# Altium PCB tpms-node.pcbdoc
Units mm, origin at the board's own origin, x right, y up, seen from the top; angles counter-clockwise.
Board outline 86.37 x 22.71 mm, 2 copper layers (Top Layer, Bottom Layer); 34 components, 70 nets, 160 pads, 31 vias.
Unrouted connection lines stored in the file: 2.
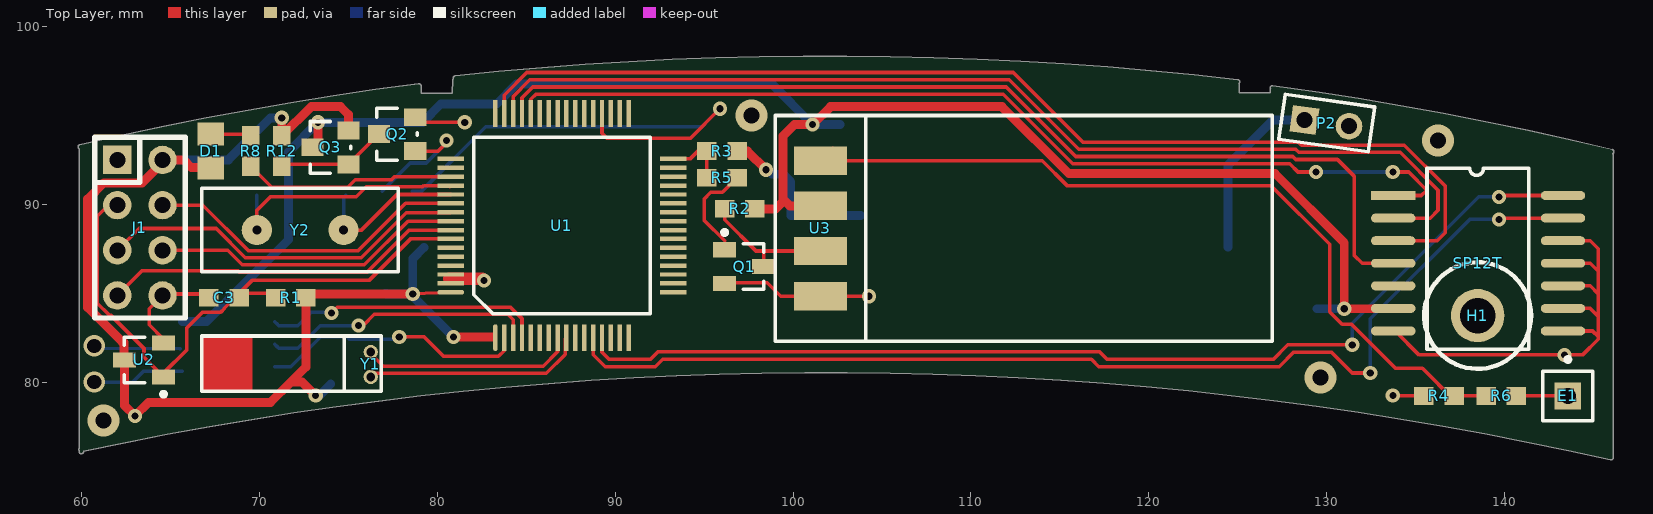
[diagram p0: Top Layer view]
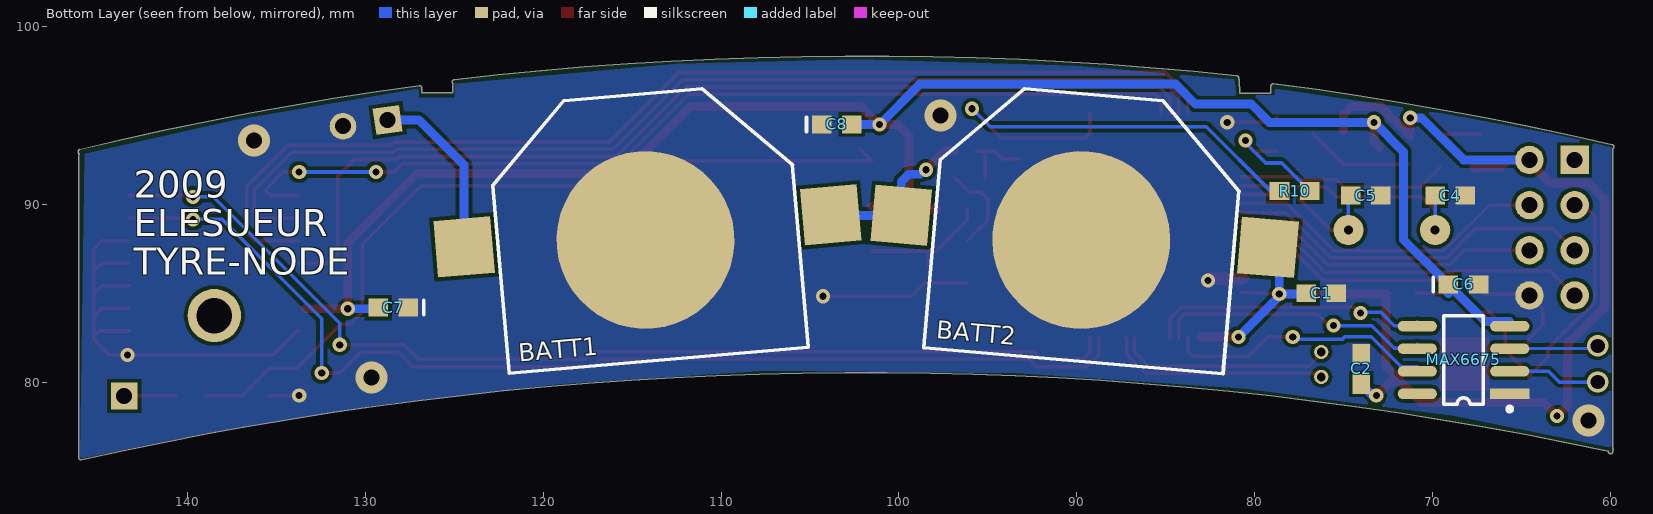
[diagram p1: Bottom Layer view, seen from below]

## Layer stack, top to bottom
Top Layer: signal copper 0.0356
Dielectric: dielectric 0.32, FR-4, Dk 4.8
Bottom Layer: signal copper 0.0356

## Board outline
59.846,76.158 cw(c59.96,76.214) 59.846,76.271 59.846,93.105 cw(c59.974,93.105) 59.848,93.128 cw(c59.919,93.234) 59.89,93.358 cw(c104.868,-101.649) 78.933,96.791 cw(c78.95,96.664) 79.069,96.709 cw(c78.967,96.633) 79.094,96.633 79.094,96.26 80.844,96.26 80.874,97.014 cw(c81.001,97.009) 80.894,97.077 cw(c81.017,97.108) 81.004,97.235 cw(c102.049,-101.783) 125.005,97.023 cw(c124.991,96.897) 125.118,96.897 cw(c124.991,96.897) 125.073,96.8 cw(c124.978,96.716) 125.105,96.716 cw(c124.978,96.716) 125.105,96.713 125.097,96.285 126.84,96.285 126.84,96.446 cw(c126.967,96.446) 126.853,96.502 cw(c126.967,96.558) 126.984,96.684 cw(c99.502,-101.547) 146.066,93.088 cw(c146.036,92.964) 146.164,92.964 cw(c146.036,92.964) 146.094,92.85 cw(c146,92.764) 146.127,92.764 146.127,75.764 cw(c146,75.764) 146.073,75.66 cw(c145.992,75.758) 145.964,75.634 ccw(c101.94,-119.33) 60.101,76.114 60.101,76.105 cw(c59.974,76.105) 59.846,76.105

## Design rules (kind name [scope] priority, off if disabled: settings)
Clearance [All] p1: gap=0.203
PolygonConnect PolygonConnect_2 [All vs IsNamedPolygon('Bottom Layer-GND')] p1: connectstyle=Direct reliefconductorwidth=0.254 reliefentries=4 polygonreliefangle="90 Angle"
PolygonConnect PolygonConnect_1 [All vs IsNamedPolygon('Bottom Layer-GND')] p2: connectstyle=Direct reliefconductorwidth=0.254 reliefentries=4 polygonreliefangle="90 Angle"
PolygonConnect [All] p3: connectstyle=Relief reliefconductorwidth=0.254 reliefentries=4 polygonreliefangle="90 Angle"
RoutingVias [All] p1: holewidth=0.4 width=0.8 viastyle="Through Hole" minholewidth=0.4 minwidth=0.8 maxholewidth=0.4 maxwidth=0.8
SilkscreenOverComponentPads [All] p1: minsilkscreentomaskgap=0.254
SolderMaskExpansion [All] p1: expansion=0.102
TestPointUsage [All] p1: valid=0 allowmultiple=FALSE
Testpoint [All] p1: side=15 testpointundercomponent=TRUE minsize=1.016 maxsize=2.54 preferedsize=1.524 minholesize=0 maxholesize=1.016 preferedholesize=0.813 testpointgrid=0.025 style=1023 order=0-112345678
Width [All] p1: maxlimit=0.5 minlimit=0.2 preferedwidth=0.2
23 further rules are at their usual default settings.

## Components (designator, comment, footprint, x,y, rotation, side; value= is the part's Value field where it differs from the comment)
BATT1 "Battery" "KEYSTONE CR1632 HOLDER" 114.25,88 r355 bottom
BATT2 "Battery" "KEYSTONE CR1632 HOLDER" 89.75,88 r5 bottom
C1 "100nF" 1608[0603] 76.25,85 r180 bottom
C2 "100nF" 1608[0603] 74,80.75 r90 bottom
C3 "10nF" 1608[0603] 68,84.75 r180 top
C4 "18pF" 1608[0603] 69,90.5 r180 bottom
C5 "18pF" 1608[0603] 73.75,90.5 r180 bottom
C6 "Cap" 1608[0603] 68.25,85.5 r180 bottom
C7 "Cap" 1608[0603] 128.436,84.197 r0 bottom
C8 "Cap" 1608[0603] 103.5,94.5 r180 bottom
D1 "YLW" 2012[0805] 67.25,93 r90 top
E1 "Antenna" PIN1 143.572,79.228 r0 top
H1 "HOLE" M2.5 138.5,83.75 r0 top
J1 "Tritium JTAG Connector" IDC8 62,92.5 r270 top
MAX6675 "MAX6675" SO8 68.25,81.25 r90 bottom
P2 "Header 2" HDR1X2 128.75,94.75 r352 top
Q1 "ZXM61N02F" SOT23 97.25,86.5 r270 top
Q2 "ZXM61N02F" SOT23-3 78.75,93 r90 top
Q3 "ZXM61P03F" SOT23-3 75,92.25 r90 top
R1 "10k" 1608[0603] 71.75,84.75 r0 top
R2 "10k" 1608[0603] 97,89.75 r0 top
R3 "10k" 1608[0603] 96,93 r180 top
R4 "DNP" 1608[0603] 136.322,79.228 r180 top
R5 "100" 1608[0603] 96,91.5 r180 top
R6 "0 Ohm LInk" 1608[0603] 139.822,79.228 r180 top
R8 "1K" 1608[0603] 69.5,93 r90 top
R10 "100R" 1608[0603] 77.75,90.75 r180 bottom
R12 "10k" 1608[0603] 71.25,93 r270 top
SP12T "SP12T" SOP14 133.75,90.5 r0 top
U1 "MSP430F149" QFP64 83.25,82.75 r90 top
U2 "XC61CN2002MR" SOT23 63.5,81.25 r90 top
U3 "TLPA" "TLPA FLAT" 99,95 r0 top
Y1 "32.768 KHz" WATCHA 76.25,80.5 r90 top
Y2 "3.6864 MHz" HC49/4H 77.808,88.558 r180 top

## Footprints (in the part's own frame and the unit in brackets; to place one, negate y for a bottom-side part, rotate by r counter-clockwise, add the part's x,y. Pads: shape width x height; smd on the part's side, far side on the other; paste and mask are expansions set on the pad)
1608[0603] [mm] "Chip Resistor; Body 1.6 x 0.8 mm (LxW typ)"
  rect 1.1x1 smd: 1(-0.85,0) 2(0.85,0)
2012[0805] [mm] "Chip Resistor; Body 2.0 x 1.3 mm (LxW typ)"
  rect 1.3x1.5 smd: 1(-0.95,0) 2(0.95,0)
HC49/4H [mm]
  round 1.7 hole 0.5: 1(3.085,0) 2(7.965,0)
  silkscreen extent 0,-2.35 11.05,2.35
HDR1X2 [mm] "Connector; Header; 2 Position"
  rect 1.5x1.5 hole 0.9: 1(0,0)
  round 1.5 hole 0.9: 2(2.54,0)
  silkscreen extent -1.27,-1.27 3.81,1.27
IDC8 [mm]
  rect 1.6x1.6 hole 0.9: 1(0,0)
  round 1.6 hole 0.9: 2(0,2.54) 3(2.54,0) 4(2.54,2.54) 5(5.08,0) 6(5.08,2.54) 7(7.62,0) 8(7.62,2.54)
  silkscreen extent -1.27,-1.27 8.89,3.81
"KEYSTONE CR1632 HOLDER" [mm]
  rect 3.2x3.2 smd: 0(-10.5,-0.5) 1(10.2,-0.5)
  round 10 smd: 2(0,0)
  silkscreen extent -8.6,-8.2 8.3,6.8
M2.5 [mm]
  round 3 hole 2: 1(0,0)
  silkscreen extent -3,-3 3,3
PIN1 [mm]
  rect 1.5x1.5 hole 0.9: 1(0,0)
  silkscreen extent -1.4,-1.4 1.4,2.17
QFP64 [mm]
  oval 1.5x0.25 smd: 1(-0.242,-0.005)
  rect 1.5x0.25 smd: 2(-0.242,-0.505) 3(-0.242,-1.005) 4(-0.242,-1.505) 5(-0.242,-2.005) 6(-0.242,-2.505) 7(-0.242,-3.005) 8(-0.242,-3.505) 9(-0.242,-4.005) 10(-0.242,-4.505) 11(-0.242,-5.005) 12(-0.242,-5.505) 13(-0.242,-6.005) 14(-0.242,-6.505) 15(-0.242,-7.005) 16(-0.242,-7.505) 33(12.358,-7.505) 34(12.358,-7.005) 35(12.358,-6.505) 36(12.358,-6.005) 37(12.358,-5.505) 38(12.358,-5.005) 39(12.358,-4.505) 40(12.358,-4.005) 41(12.358,-3.505) 42(12.358,-3.005) 43(12.358,-2.505) 44(12.358,-2.005) 45(12.358,-1.505) 46(12.358,-1.005) 47(12.358,-0.505) 48(12.358,-0.005)
  rect 0.25x1.5 smd: 17(2.308,-10.005) 18(2.808,-10.005) 19(3.308,-10.005) 20(3.808,-10.005) 21(4.308,-10.005) 22(4.808,-10.005) 23(5.308,-10.005) 24(5.808,-10.005) 25(6.308,-10.005) 26(6.808,-10.005) 27(7.308,-10.005) 28(7.808,-10.005) 29(8.308,-10.005) 30(8.808,-10.005) 31(9.308,-10.005) 32(9.808,-10.005) 49(9.808,2.495) 50(9.308,2.495) 51(8.808,2.495) 52(8.308,2.495) 53(7.808,2.495) 54(7.308,2.495) 55(6.808,2.495) 56(6.308,2.495) 57(5.808,2.495) 58(5.308,2.495) 59(4.808,2.495) 60(4.308,2.495) 61(3.808,2.495) 62(3.308,2.495) 63(2.808,2.495)
  oval 0.25x1.5 smd: 64(2.308,2.495)
  silkscreen extent 1.09,-8.72 11.02,1.21
SO8 [mm]
  rect 0.6x2.2 smd: 1(-1.905,-2.6)
  oval 0.6x2.2 smd: 2(-0.635,-2.6) 3(0.635,-2.6) 4(1.905,-2.6) 5(1.905,2.6) 6(0.635,2.6) 7(-0.635,2.6) 8(-1.905,2.6)
  silkscreen extent -2.88,-2.72 2.5,1.1
SOP14 [mm] "SP12T Footprint"
  rect 2.5x0.5 smd: 1(0,0)
  oval 2.5x0.5 smd: 2(0,-1.27) 3(0,-2.54) 4(0,-3.81) 5(0,-5.08) 6(0,-6.35) 7(0,-7.62) 8(9.55,-7.62) 9(9.55,-6.35) 10(9.55,-5.08) 11(9.55,-3.81) 12(9.55,-2.54) 13(9.55,-1.27) 14(9.55,0)
  silkscreen extent 1.9,-8.64 7.62,1.52
SOT23 [mm] "SOT-23; 3 Leads; Body 3.0 x 2.6 mm, inc. leads (LxW max)"
  rect 0.85x1.3 smd: 1(-0.95,-1.1) 2(0.95,-1.1) 3(0,1.1)
  silkscreen extent -2.05,-1.22 1.28,1.1
SOT23-3 [mm]
  rect 1x1.25 smd: 1(0,0) 2(1.905,0) 3(0.965,2.032)
  silkscreen extent -0.51,-0.13 2.41,2.16
"TLPA FLAT" [mm]
  rect 3x1.6 smd: 1(2.54,-10.16) 2(2.54,-7.62) 3(2.54,-5.08) 4(2.54,-2.54)
  silkscreen extent 0,-12.7 27.94,0
WATCHA [mm]
  round 0.8 hole 0.5: 1(-0.2,0) 2(1.2,0)
  silkscreen extent -1,-0.6 2.1,9.5

## Part data
BATT1 BATT2: "Multicell Battery"
C1 C2 C3 C4 C5: library part CAP, "Capacitor"
C6 C7 C8: "Capacitor"
D1: library part LED1, "Typical RED GaAs LED"
E1: "Generic Antenna"
H1: "Hole"
J1: library part 430F_JTAG_TRITIUM, "Tritium JTAG interface for MSP430"
MAX6675: "MAXIM 6675 SPI Thermocouple Amplifier"
P2: "Header, 2-Pin"
Q1 Q2: "1.7A, 20V N-Channel Enhancement mode FET"
Q3: "1.1A, 30V P-Channel Enhancement mode FET"
R1 R2 R3 R4 R5 R6 R8 R10 R12: library part RES1, "Resistor"
SP12T: "Pressure/Temperature sensor"
U1: library part MSP430F14X
U2: library part XC61F, "SOT23 reset generator"
Y1 Y2: library part CRYSTAL, "Crystal"

## Via types
v1: diameter 0.8, hole 0.4, Top Layer to Bottom Layer, 23 vias
v2: diameter 1.8, hole 0.9, Top Layer to Bottom Layer, 4 vias
v3: diameter 1.2, hole 0.8, Top Layer to Bottom Layer, 2 vias
v4: diameter 0.8, hole 0.4, Top Layer to Bottom Layer, tented bottom, 2 vias

## Nets (pads, with @x,y where several pads share a name; then routed paths per layer and width w, separated by ;. In a path a pad name is that pad's centre, name@x,y a point inside that pad or via, vN(x,y) a via of type N, cw(c..) or ccw(c..) an arc to the next point about the centre after c; other vN are vias at no path point)
3V: BATT1.0 BATT1.1 BATT2.0 BATT2.1 C1.1 C2.1 D1.1 J1.2 P2.1 Q3.2 R1.2 R3.1 R12.1 U1.1 U1.64 U2.3 | length 90.8
  Top Layer w0.2: v1(78.613,84.963) U1.64
  Top Layer w0.5: J1.2 65.742,92.5 66.167,92.075 D1.1@67.25,92.075 ; J1.2@64.614,92.427 63.4,91.213 61.241,91.213 60.325,90.297 60.325,84.213 62.295,82.243 62.37,82.243 62.37,81.28 U2.3 62.4,78.697 v1(62.992,78.105) 63.754,78.867 70.612,78.867 71.755,80.01 ; D1.1 D1.1@67.666,92.05 ; v1(71.247,94.869) R12.1 72.904,95.504 74.549,95.504 75,95.053 Q3.2 ; R1.2 72.6,80.855 71.755,80.01 ; R1.2@72.6,85 72.637,84.963 v1(78.613,84.963) v1@78.708,85.058 ; v1(73.152,79.248) 72.39,80.01 71.755,80.01 ; v1(80.899,82.55) 83.058,82.55 ; R3.1 97.433,93 v1(98.485,91.948)
  Bottom Layer w0.5: J1.2 68.243,92.5 70.612,94.869 v1(71.247,94.869) ; v1(73.152,79.248) 73.348,79.248 C2.1 ; C1.1 77.137,84.963 v1(78.613,84.963) ; BATT2.0 78.613,86.95 v1(78.613,84.963) ; v1(80.899,82.55) 78.613,84.836 v1(78.613,84.963) ; 98.806,91.694 99.441,91.694 99.868,91.267 BATT2.1 BATT1.0@103.807,89.387 ; BATT1.1 124.455,92.197 127.008,94.75 P2.1
"3V SWITCHED": C6.1 C7.2 C8.2 MAX6675.4 Q3.3 R2.2 SP12T.6 U3.3 | length 98.6
  Top Layer w0.5: Q3.3 73.279,93.526 v1(73.279,94.615) ; R2.2 99.021,89.75 99.441,90.17 99.441,93.853 100.076,94.488 v1(101.092,94.488) 102.108,95.504 111.743,95.504 115.508,91.739 127.102,91.739 131,87.841 v1(131,84.132) SP12T.6@133.401,84.132 ; 99.568,90.17 99.818,89.92 U3.3
  Bottom Layer w0.5: MAX6675.4@65.65,83.405 67.005,83.405 C6.1 71.628,88.028 71.628,92.964 v1(73.279,94.615) 79.165,94.615 80.196,95.646 83.327,95.646 84.455,96.774 98.806,96.774 v1(101.092,94.488) 102.638,94.488 C8.2 ; C6.1@69.1,85 C6.1@69.19,85.09 ; C7.2@129.471,84.132 v1(131,84.132)
/RESET: C3.1 J1.3 R1.1 U1.58 U2.1 | length 34.3
  Top Layer w0.2: J1.3 61.5,89.96 60.878,89.338 60.878,84.442 61.543,83.777 61.618,83.777 63.5,81.895 63.5,81.4 U2.1 64.6,80.519 65.913,81.832 65.913,83.058 66.802,83.947 67.825,83.947 68.003,84.124 68.003,84.153 68.725,84.875 69.575,85.725 76.154,85.725 78.487,88.058 U1.58 ; C3.1@68.85,85 R1.1@70.9,85
ADC0: U1.59
ADC1: U1.60
ADC2: U1.61
ADC3: MAX6675.7 U1.2 | length 14.9
  Top Layer w0.2: v1(77.851,82.55) 79.248,82.55 80.343,81.455 83.433,81.455 83.755,81.778 U1.2
  Bottom Layer w0.2: MAX6675.7@70.85,80.865 71.761,80.865 73.446,82.55 74.93,82.55 75.057,82.423 77.597,82.423 v1@77.724,82.55
ADC4: MAX6675.6 U1.3 | length 15.4
  Top Layer w0.2: v1(75.565,83.185) 75.819,83.185 76.454,83.82 83.947,83.82 84.255,83.512 U1.3
  Bottom Layer w0.2: MAX6675.6@70.85,82.135 70.975,82.01 71.07,81.915 72.136,81.915 73.406,83.185 v1(75.565,83.185)
ADC5: MAX6675.5 U1.4 | length 15.6
  Top Layer w0.2: v1(74.041,83.893) 74.371,84.223 84.114,84.223 84.755,83.582 U1.4
  Bottom Layer w0.2: MAX6675.5@70.85,83.405 70.975,83.28 71.07,83.185 72.136,83.185 72.898,83.947 v1@73.841,83.947
ADC6: U1.5
ADC7: U1.6
GND: BATT1.2 BATT2.2 C1.2 C2.2 C3.2 C4.2 C5.2 C6.2 C7.1 C8.1 J1.8 MAX6675.1 P2.2 Q1.2 Q2.2 R4.2 SP12T.7 SP12T.8 SP12T.9 SP12T.10 SP12T.11 SP12T.12 U1.62 U1.63 U2.2 U3.1 | length 49.2
  Top Layer w0.2: J1.8 63.79,84.13 63.79,83.23 64.6,82.42 U2.2 ; J1.8@64.623,84.963 C3.2@67.113,84.963 ; Q2.2 79.04,94.615 v1(81.534,94.615) ; v1@82.525,85.827 v1(82.626,85.725) ; Q1.2@96.15,85.598 98.552,85.598 99.314,84.836 101.536,84.836 U3.1 v1@104.263,84.84 ; v1(133.731,79.248) R4.2@135.452,79.248 ; SP12T.7 133.857,82.88 135.203,81.534 v1(143.383,81.534) 144.399,81.534 145.288,82.423 145.288,82.55 ; SP12T.8 144.958,82.88 145.288,82.55 ; SP12T.9 144.831,84.15 145.288,83.693 ; SP12T.10 144.831,85.42 145.288,84.963 ; SP12T.11 144.831,86.69 145.288,86.233 ; SP12T.12 144.831,87.96 145.288,87.503 145.288,86.233 ; 145.288,82.55 145.288,83.693 ; 145.288,83.693 145.288,84.963 ; 145.288,84.963 145.288,86.233
  Top Layer w0.7: 80.67,85.827 80.755,85.827 v1@82.525,85.827
  other v1: 104.267,84.836
  other v2: 61.214,77.851 129.667,80.264 136.271,93.599 97.663,94.996
NetD1_2: D1.2 R8.2 | length 2.3
  Top Layer w0.2: D1.2 69.4,93.95 R8.2
NetE1_1: E1.1 R6.1 | length 2.9
  Top Layer w0.2: R6.1 E1.1
NetMAX6675_2: MAX6675.2 | length 5.1
  Bottom Layer w0.2: v3@60.833,80.01 62.865,80.01 63.47,80.615 MAX6675.2
  other v3: 60.706,80.01
NetMAX6675_3: MAX6675.3 | length 4.8
  Bottom Layer w0.2: v3@60.706,81.915 MAX6675.3@65.523,81.881
  other v3: 60.706,82.042
NetQ1_1: Q1.1 R5.1 | length 5.2
  Top Layer w0.2: 96.15,87.95 94.996,89.104 94.996,90.297 95.377,90.678 96.028,90.678 R5.1
NetQ1_3: Q1.3 R2.1 U3.2 | length 7.6
  Top Layer w0.2: R2.1 96.15,89.143 97.913,87.38 98.364,87.38 ; Q1.3 98.35,87.366 98.364,87.38 ; U3.2 98.364,87.38
NetQ2_1: Q2.1 R10.2 | length 6.8
  Top Layer w0.2: Q2.1 80.046,93 v1@80.581,93.535
  Bottom Layer w0.2: R10.2 78.479,92.329 79.375,92.329 v1@80.518,93.472
  other v1: 80.518,93.599
NetQ2_3: Q2.3 Q3.1 R12.2 | length 6.1
  Top Layer w0.2: R12.2@71.35,92.25 Q3.1 75.003,92.25 Q2.3
NetR4_1: R4.1 R6.2 U3.4 | length 46.1
  Top Layer w0.2: U3.4@102.235,93.155 U3.4 114.005,92.46 115.406,91.059 126.873,91.059 130.175,87.757 130.175,83.953 130.875,83.254 131.409,83.254 133.881,80.782 135.396,80.782 136.325,79.853 136.325,79.843 136.94,79.228 R4.1 R6.2
P1.0: SP12T.13 U1.12 | length 62.4
  Top Layer w0.2: U1.12 88.755,81.552 89.43,80.877 92.254,80.877 92.665,81.288 116.781,81.288 117.192,80.877 127.344,80.877 128.163,81.696 130.273,81.696 131.451,80.518 v1(132.461,80.518) ; v4(139.7,89.154) 139.776,89.23 SP12T.13 SP12T.13@143.249,89.281
  Bottom Layer w0.2: v1(132.461,80.518) 132.461,83.566 138.049,89.154 v4(139.7,89.154)
P1.1: SP12T.14 U1.13 | length 59.9
  Top Layer w0.2: U1.13 89.255,81.687 89.662,81.28 91.967,81.28 92.401,81.714 117.237,81.714 117.671,81.28 127.008,81.28 127.83,82.102 v1(131.451,82.102) ; v4(139.7,90.424) 139.776,90.5 SP12T.14
  Bottom Layer w0.2: v1(131.451,82.102) 131.445,83.312 138.557,90.424 v4(139.7,90.424)
P1.2: U1.14
P1.3: U1.15
P1.4: U1.16
P1.5: U1.17
P1.6: U1.18
P1.7: U1.19
P2.0: U1.20
P2.1: U1.21
P2.2: U1.22
P2.3: U1.23
P2.4: U1.24
P2.5: U1.25
P2.6: U1.26
P2.7: U1.27
P3.0: U1.28
P3.1: U1.29
P3.2: U1.30
P3.3: U1.31
P3.4: R3.2 R5.2 U1.32 | length 4.1
  Top Layer w0.2: U1.32 94.209,92.558 94.651,93 R3.2 ; R5.2 R3.2 ; R3.2@95.65,93 R3.2
P3.5: U1.33
P3.6: U1.34
P3.7: U1.35
P4.0: R10.1 U1.36 | length 27.7
  Top Layer w0.2: U1.36 89.255,94.006 89.535,93.726 94.234,93.726 v1(95.885,95.377)
  Bottom Layer w0.2: R10.1 79.106,90.75 82.717,94.361 94.869,94.361 v1(95.885,95.377)
P4.1: U1.37
P4.2: U1.38
P4.3: U1.39
P4.4: U1.40
P4.5: U1.41
P4.6: U1.42
P4.7: U1.43
P5.0: SP12T.1 U1.44 | length 55.8
  Top Layer w0.2: U1.44 85.255,95.911 85.543,96.199 111.83,96.199 115.737,92.292 127.926,92.292 128.397,91.821 v1(129.413,91.821) ; v1(133.731,91.821) 134.62,91.821 135.636,90.805 135.331,90.5 SP12T.1
  Bottom Layer w0.2: v1@129.159,91.821 v1(129.413,91.821) v1(133.731,91.821)
P5.1: SP12T.4 U1.45 | length 56.8
  Top Layer w0.2: U1.45 84.755,95.992 85.365,96.602 111.997,96.602 115.904,92.695 128.093,92.695 128.264,92.524 130.615,92.524 131.572,91.567 131.572,87.122 132.004,86.69 SP12T.4
P5.2: SP12T.2 U1.46 | length 59.8
  Top Layer w0.2: U1.46 84.255,96.068 85.193,97.005 112.164,97.005 116.071,93.098 128.26,93.098 128.431,92.927 134.149,92.927 136.271,90.805 136.271,89.662 135.839,89.23 SP12T.2
P5.3: SP12T.3 U1.47 | length 62.9
  Top Layer w0.2: U1.47 83.755,96.143 85.029,97.417 112.387,97.417 116.303,93.501 128.427,93.501 128.598,93.33 134.381,93.33 136.674,91.037 136.674,88.414 136.22,87.96 SP12T.3
P5.4: U1.48
P5.5: U1.49
P5.6: U1.50
P5.7: R8.1 U1.51 | length 12
  Top Layer w0.2: R8.1 70.689,90.961 74.955,90.961 75.383,91.389 77.419,91.389 77.588,91.558 U1.51
TCK: J1.7 U1.57 | length 20.3
  Top Layer w0.2: J1.7 63.388,86.268 68.793,86.268 68.865,86.196 76.055,86.196 78.417,88.558 U1.57
TDI: J1.5 U1.55 | length 21
  Top Layer w0.2: J1.5 63.226,88.646 67.555,88.646 69.199,87.002 75.722,87.002 78.255,89.535 80.732,89.535 U1.55
TDO: J1.4 U1.54 | length 18.4
  Top Layer w0.2: J1.4 66.811,89.96 69.366,87.405 75.555,87.405 78.208,90.058 U1.54
TMS: J1.6 U1.56 | length 17.6
  Top Layer w0.2: J1.6 68.211,87.42 69.032,86.599 75.888,86.599 78.347,89.058 U1.56
VREF: U1.7
XT1IN: U1.8 Y1.2 | length 11.9
  Top Layer w0.2: Y1.2@76.25,81.6 76.951,80.899 85.95,80.899 86.755,81.704 U1.8
XT1OUT: U1.9 Y1.1 | length 12.3
  Top Layer w0.2: Y1.1@76.254,80.496 86.117,80.496 87.183,81.562 87.183,82.436 U1.9
XT2IN: C5.1 U1.53 Y2.1 | length 8.9
  Top Layer w0.2: Y2.1 75.731,88.558 77.731,90.558 U1.53
  Bottom Layer w0.2: Y2.1 74.723,90.373 74.725,90.375 C5.1@74.85,90.5
XT2OUT: C4.1 U1.52 Y2.2 | length 14.7
  Top Layer w0.2: Y2.2@69.85,88.488 69.85,88.558 69.85,89.662 70.612,90.424 75.438,90.424 76,90.986 79.175,90.986 79.248,91.059 U1.52 U1.52 U1.52@80.683,90.986
  Bottom Layer w0.2: Y2.2 69.85,88.564 C4.1
pads on no net: H1.1 J1.1 MAX6675.8 SP12T.5 U1.10 U1.11

## Polygon pours and split planes (outlines as drawn)
GND on Bottom Layer "Bottom Layer-GND" (solid, pour order 1000): 59.944,93.218 59.944,76.327 68.834,78.105 80.518,79.629 93.345,80.518 107.442,80.645 119.126,79.883 129.159,78.74 139.065,77.089 146.05,75.692 145.796,92.837 137.414,94.742 127,96.52 127,96.012 124.968,96.012 124.968,96.774 112.522,97.917 102.362,98.171 90.043,97.79 81.153,97.028 81.026,96.139 78.867,96.139 78.867,96.52 69.469,95.123 63.246,93.98 59.944,93.218

## Other copper
Top Layer:
  rectangle: 66.802,79.502 69.596,82.55

## Silkscreen, mask and mechanical layers (free items; w line width, h text height)
Bottom Overlay:
  text "2009" at 143.027,90.373 h1.52
  text "ELESUEUR" at 143.027,88.214 h1.52
  text "TYRE-NODE" at 143.027,86.055 h1.52
Top Solder:
  rectangle: 66.802,79.502 69.596,82.55
Mechanical 1:
  lines w0.2: 59.72,75.771 59.72,93.432 ; 78.967,96.918 78.967,96.387 80.85,96.387 80.895,97.536 ; 146.127,75.377 146.127,93.091 ; 125.118,96.158 126.873,96.158 125.118,96.158
  lines w0.254: 59.673,75.771 cw(c101.94,-119.711) 145.992,75.377 ; 59.674,93.559 cw(c104.868,-101.268) 78.95,97.045 ; 81.017,97.616 cw(c102.049,-101.275) 124.991,97.405 ; 125.118,96.181 125.118,97.282 ; 126.873,96.158 126.873,96.652 ; 126.967,96.685 cw(c99.502,-101.42) 146.036,93.091